# EAGLE board CryptoFlashRTC (EAGLE 7.7.0)
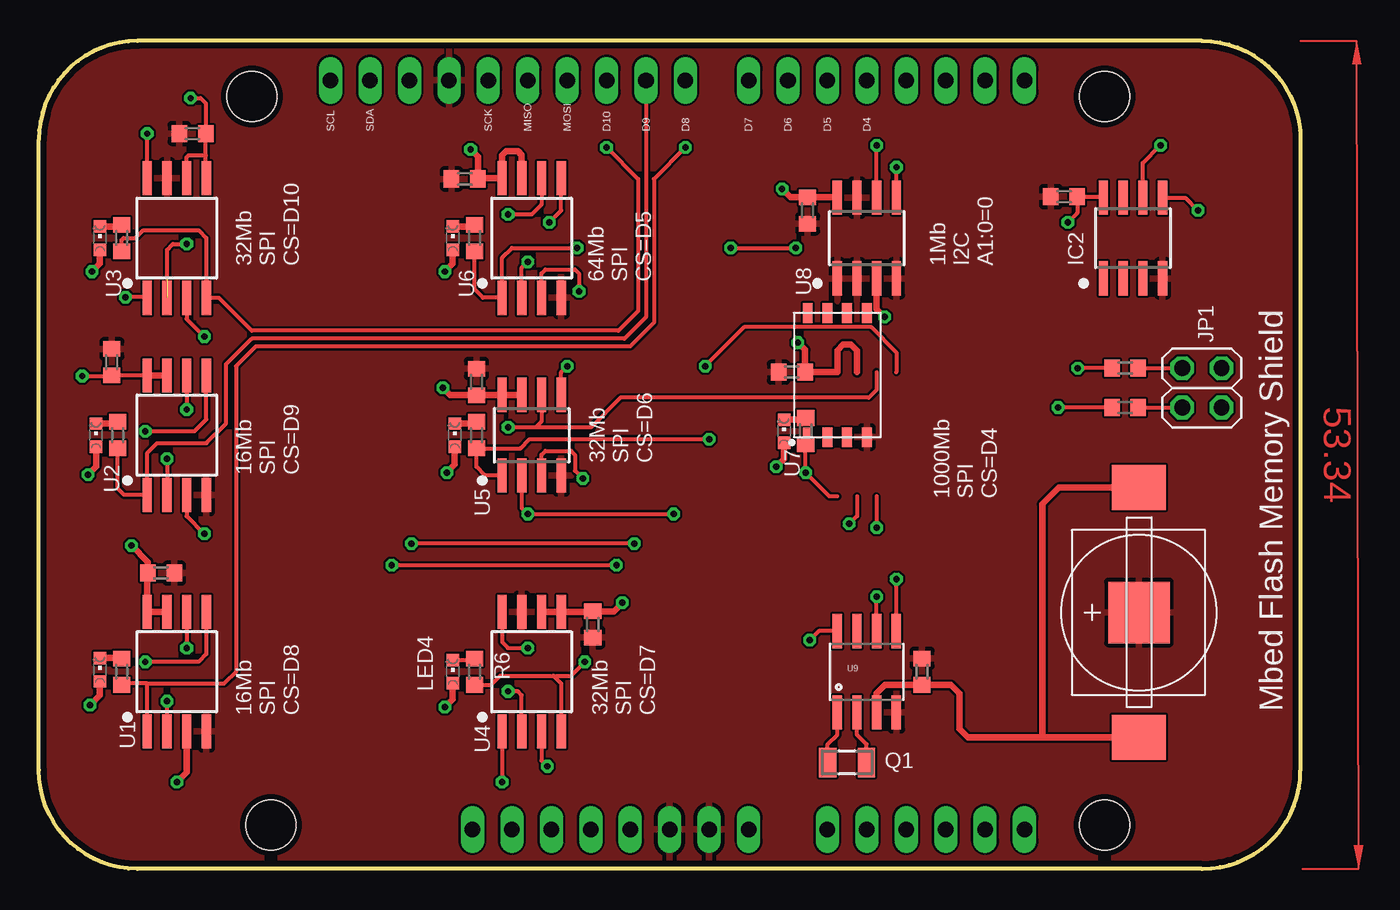
[diagram p0: board, top side]
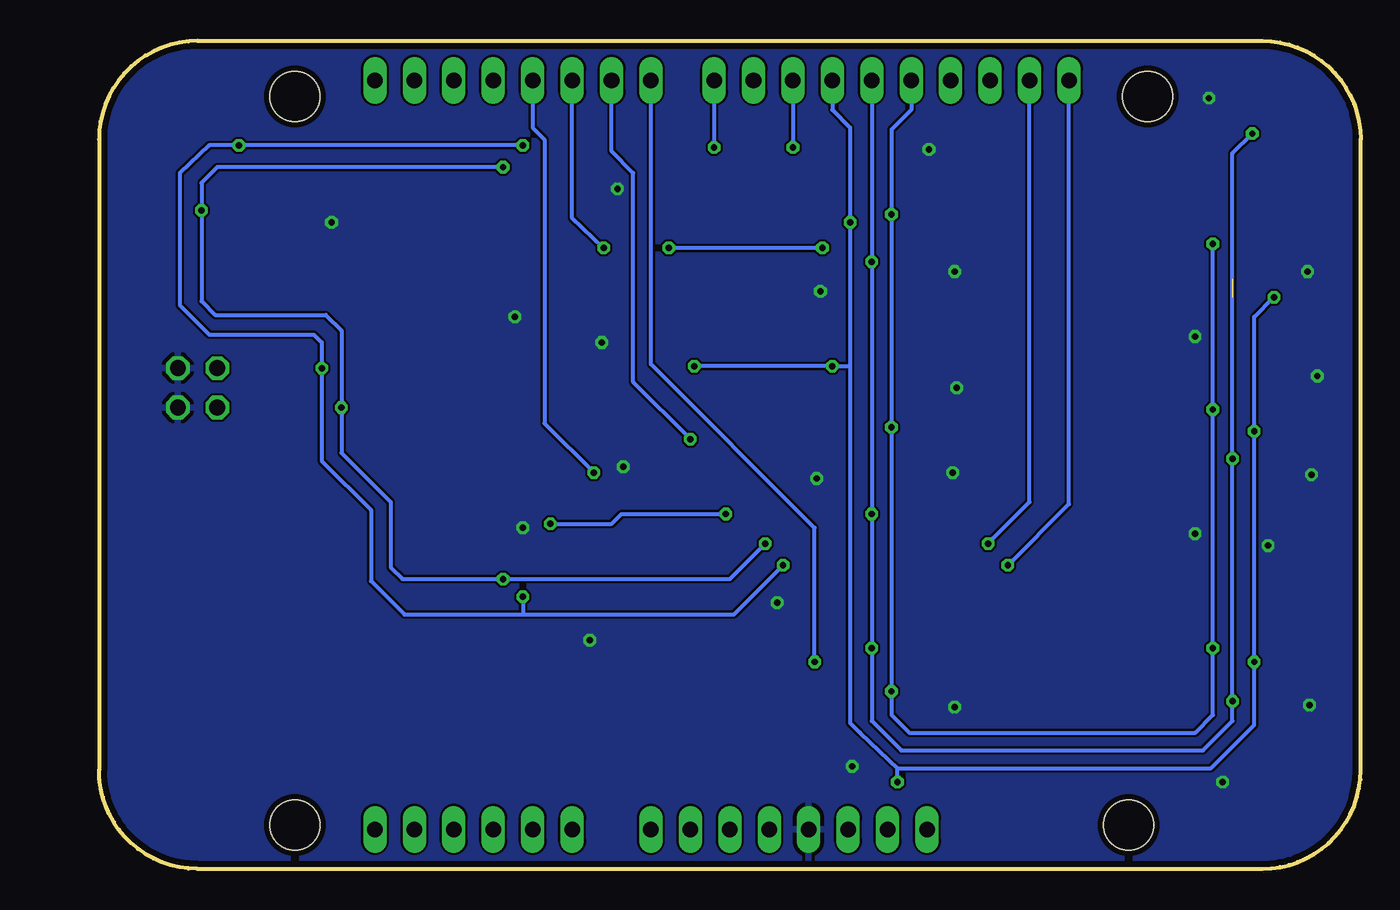
[diagram p1: board, bottom side, seen from below]

Size 81.28 x 53.34 mm. Coordinates in mm from the lower left corner, seen from the top.
Copper layers ((1*16)): Top 0.035mm / dielectric 0.8mm / Bottom 0.035mm
Design rules "mbed-HDK-6-6-2-layer": minimum track width 6mil, minimum drill 9mil, track to track 6mil, track to pad 6mil, pad to pad 6mil, via to via 6mil, smd to smd 6mil, copper to edge 15mil, drill to drill 8mil, minimum pad ring 10mil, minimum via ring 8mil, stop-mask expansion 4mil, vias tented up to drill 0mil, thermal gap 10mil

## Footprints (pad centres in the part's own frame; a part is rotated, then mirrored left to right if it is on the bottom)
K64F/K22F = drill 1 long: 1 27.94,2.54; 2 30.48,2.54; 3 33.02,2.54; 4 35.56,2.54; 5 38.1,2.54; 6 40.64,2.54; 7 43.18,2.54; 8 45.72,2.54; 9 50.8,2.54; 10 53.34,2.54; 11 55.88,2.54; 12 58.42,2.54; 13 60.96,2.54; 14 63.5,2.54; 15 63.5,50.8; 16 60.96,50.8; 17 58.42,50.8; 18 55.88,50.8; 19 53.34,50.8; 20 50.8,50.8; 21 48.26,50.8; 22 45.72,50.8; 23 41.656,50.8; 24 39.116,50.8; 25 36.576,50.8; 26 34.036,50.8; 27 31.496,50.8; 28 28.956,50.8; 29 26.416,50.8; 30 23.876,50.8; 31 21.336,50.8; 32 18.796,50.8 | hole 3.2: 13.729,49.759; 14.948,2.819; 68.656,2.819; 68.656,49.759
0603 = smd 1 x 1.1: 1 -0.85,0; 2 0.85,0
SO8 = smd 0.6 x 2.2: 1 -1.905,-2.6; 2 -0.635,-2.6; 3 0.635,-2.6; 4 1.905,-2.6; 5 1.905,2.6; 6 0.635,2.6; 7 -0.635,2.6; 8 -1.905,2.6
2X02 = drill 1.016 octagon: 1 -1.27,-1.27; 2 -1.27,1.27; 3 1.27,-1.27; 4 1.27,1.27
CHIPLED_0603 = smd 0.8 x 0.8: A 0,-0.75; C 0,0.75
FC135 = smd 1.1 x 1.9: X1 -1.25,0; X2 1.25,0
SO8-WIDE@1 = smd 0.6 x 2.2: 1 -1.905,-3.85; 2 -0.635,-3.85; 3 0.635,-3.85; 4 1.905,-3.85; 5 1.905,3.85; 6 0.635,3.85; 7 -0.635,3.85; 8 -1.905,3.85
SO8-WIDE = smd 0.6 x 2.2: 1 -1.905,-3.85; 2 -0.635,-3.85; 3 0.635,-3.85; 4 1.905,-3.85; 5 1.905,3.85; 6 0.635,3.85; 7 -0.635,3.85; 8 -1.905,3.85
8-U-PDFN = smd 1.27 x 0.635: 1 0,3.81; 2 0,2.54; 3 0,1.27; 4 0,0; 5 8,0; 6 8,1.27; 7 8,2.54; 8 8,3.81
SO08 = smd 0.61 x 2.21: 1 -1.905,-2.616; 2 -0.635,-2.616; 3 0.635,-2.616; 4 1.905,-2.616; 5 1.905,2.616; 6 0.635,2.616; 7 -0.635,2.616; 8 -1.905,2.616
3030 = smd 3.96 x 3.96: NEG 0,0 | smd 2.9 x 3.5: P$1 8.05,0; P$2 -8.05,0

## Placement (x,y rotation side)
BRD1  K64F/K22F-SHIELD  [K64F/K22F]  0,0 0 top
C1  100nF  [0603]  28.19,31.37 90 top
C2  100nF  [0603]  9.91,47.37 180 top
C3  100nF  [0603]  48.51,32 180 top
C4  100nF  [0603]  35.69,15.75 270 top
C5  100nF  [0603]  27.43,44.45 180 top
C6  100nF  [0603]  7.87,19.05 0 top
C7  100nF  [0603]  4.7,32.64 90 top
C8  100nF  [0603]  49.53,42.42 90 top
C9  100nF  [0603]  66.04,43.31 180 top
C10  100nF  [0603]  56.9,12.7 90 top
IC2  ATECC608A  [SO8]  70.48,40.64 0 top
JP1  [2X02]  74.93,30.99 270 top
LED1  RED  [CHIPLED_0603]  48.01,28.19 0 top
LED2  RED  [CHIPLED_0603]  26.67,40.64 0 top
LED3  RED  [CHIPLED_0603]  26.8,27.94 0 top
LED4  RED  [CHIPLED_0603]  26.67,12.7 0 top
LED5  RED  [CHIPLED_0603]  3.94,40.64 0 top
LED6  RED  [CHIPLED_0603]  3.68,27.94 0 top
LED7  RED  [CHIPLED_0603]  3.94,12.83 0 top
Q1  ABS07-32.768KHZ-T  [FC135]  52.07,6.86 0 top
R1  2k2  [0603]  69.98,32.26 180 top
R2  2k2  [0603]  69.98,29.72 180 top
R3  470R  [0603]  49.4,28.19 270 top
R4  470R  [0603]  28.07,40.64 270 top
R5  470R  [0603]  28.19,27.94 270 top
R6  470R  [0603]  28.07,12.7 270 top
R7  470R  [0603]  5.33,40.64 270 top
R8  470R  [0603]  5.08,27.94 270 top
R9  470R  [0603]  5.33,12.7 270 top
U1  S25FL116K0XNFA013  [SO8-WIDE@1]  8.89,12.7 0 top
U2  SST25VF016B-50-4C-S2AF-T  [SO8-WIDE]  8.89,27.94 0 top
U3  AT45DB321E-SHF-B  [SO8-WIDE]  8.89,40.64 0 top
U4  AT45DQ321-SHF-B  [SO8-WIDE]  31.75,12.7 0 top
U5  MX25R3235FM1IH0  [SO8]  31.75,27.94 0 top
U6  AT25DF641A-SH-B  [SO8-WIDE]  31.75,40.64 0 top
U7  MT29F1G01ABBFDWB-IT:FTR  [8-U-PDFN]  53.34,27.81 90 top
U8  24LC1025T-I/SN  [SO8]  53.34,40.64 0 top
U9  DS1307  [SO08]  53.34,12.7 0 top
U$1  3030  [3030]  70.87,16.51 90 top

## Library data of the parts
BRD1 = mbed-HDK-misc-Board
C1-C10 R1-R9 = mbed-HDK-RLC
IC2 = mbed-HDK-MF-ATMEL
JP1 = pinhead
LED1-LED7 = mbed-HDK-Optical; MF: Wurth Electronics Inc; MFN: 150060RS75000; OC-DIGIKEY: 732-4978-1-ND; OC-MOUSER: 710-150060RS75000; OC-NEWARK: 2322071
Q1 = mbed-HDK-Oscillator; MF: Abracon; MFN: ABS07-32.768KHZ-T; OC-DIGIKEY: 535-9542-1-ND; OC-MOUSER: 535-9542-1-ND; OC-NEWARK: 2101347
U1 = mbed-HDK-IC; MF: Cypress Semiconductor Corp; MFN: S25FL116K0XNFA013; OC-DIGIKEY: 428-4343-1-ND; OC-MOUSER: 727-25FL116K0XNFA013
U2 = mbed-HDK-IC; MF: Microchip; MFN: SST25VF016B-50-4C-S2AF-T; OC-DIGIKEY: SST25VF016B-50-4C-S2AF-TCT-ND; OC-MOUSER: 579-25VF016B5CS2AF-T
U3 = mbed-HDK-IC; MF: Adesto Technologies; MFN: AT45DB321E-SHF-B; OC-DIGIKEY: 1265-1072-5-ND; OC-MOUSER: 988-AT45DB321E-SHF-B; OC-NEWARK: 2414318
U4 = mbed-HDK-IC; MF: Adesto Technologies; MFN: AT45DQ321-SHF-B; OC-DIGIKEY: AT45DQ321-SHF-B-ND; OC-MOUSER: 988-AT45DQ321-SHF-B
U5 = mbed-HDK-IC; MF: Macronix; MFN: MX25R3235FM1IH0; OC-DIGIKEY: 1092-1175-ND
U6 = mbed-HDK-IC; MF: Adesto Technologies; MFN: AT25DF641A-SH-B; OC-DIGIKEY: 1265-1047-ND; OC-MOUSER: 988-AT25DF641A-SH-B
U7 = mbed-HDK-IC; MF: Micron Technology Inc.; MFN: MT29F1G01ABBFDWB-IT:F TR; OC-DIGIKEY: 557-1655-1-ND
U8 = mbed-HDK-IC; MF: Microchip Technology; MFN: 24LC1025T-I/SN; OC-DIGIKEY: 24LC1025T-I/SNCT-ND; OC-MOUSER: 579-24LC1025T-I/SN; OC-NEWARK: 86W6594
U9 = Seeed
U$1 = mbed-HDK-Connector; MF: Keystone; MFN: 3030; OC-DIGIKEY: 36-3030-ND; OC-MOUSER: 534-3030; OC-NEWARK: 39T8899

## Nets
+3.3V: BRD1.4 C1.1 C2.1 C3.1 C4.1 C5.1 C6.1 C7.1 C8.2 C9.1 IC2.8 JP1.2 JP1.4 LED1.A LED2.A LED3.A LED4.A LED5.A LED6.A LED7.A U1.3 U1.7 U1.8 U2.3 U2.7 U2.8 U3.3 U3.5 U3.6 U4.3 U4.5 U4.6 U5.3 U5.7 U5.8 U6.3 U6.7 U6.8 U7.3 U7.7 U7.8 U8.3 U8.8 U9.8
GND: BRD1.6 BRD1.7 BRD1.29 C1.2 C2.2 C3.2 C4.2 C5.2 C6.2 C7.2 C8.1 C9.2 C10.2 IC2.4 U1.4 U2.4 U3.7 U4.7 U5.4 U6.4 U7.4 U8.1 U8.2 U8.4 U8.7 U9.4 U$1.NEG
I2C_SCL: BRD1.32 IC2.6 R1.2 U8.6 U9.6
I2C_SDA: BRD1.31 IC2.5 R2.2 U8.5 U9.5
N$1: LED1.C R3.1
N$2: LED2.C R4.1
N$3: LED3.C R5.1
N$4: LED4.C R6.1
N$5: LED5.C R7.1
N$6: LED6.C R8.1
N$7: LED7.C R9.1
N$8: JP1.1 R1.1
N$9: JP1.3 R2.1
SPI_CS-1: BRD1.25 R7.2 U3.4
SPI_CS-2: BRD1.24 R8.2 U2.1
SPI_CS-3: BRD1.23 R9.2 U1.1
SPI_CS-4: BRD1.22 R6.2 U4.4
SPI_CS-5: BRD1.21 R5.2 U5.1
SPI_CS-6: BRD1.20 R4.2 U6.1
SPI_CS-7: BRD1.19 R3.2 U7.1
SPI_MISO: BRD1.27 U1.2 U2.2 U3.8 U4.8 U5.2 U6.2 U7.2
SPI_MOSI: BRD1.26 U1.5 U2.5 U3.1 U4.1 U5.5 U6.5 U7.5
SPI_SCK: BRD1.28 U1.6 U2.6 U3.2 U4.2 U5.6 U6.6 U7.6
VBAT: C10.1 U9.3 U$1.P$1 U$1.P$2
X1: Q1.X1 U9.1
X2: Q1.X2 U9.2

## Tracks (layer width: path | path; a pad name or v marks a point on that pad's centre or on a via)
+3.3V  (via drill 0.41)
  Top 0.254: U2.3 9.53,22.73 v10.67,21.59 | U4.3 32.38,6.99 v32.77,6.6 | U9.8 50.24,15.32 v49.66,14.73 | v66.29,41.66 66.89,42.25 C9.1 68.51,43.31 IC2.8 | 53.98,24 v53.98,21.97 | U5.3 32.38,26.67 32.64,26.92 34.29,26.92 34.54,26.67 34.54,25.65 v35.05,25.15 | U6.3 32.38,38.35 32.64,38.61 34.54,38.61 34.8,38.35 v34.8,37.21 | U2.8 C7.1 4.66,31.75 v2.79,31.75 | U3.3 9.53,35.43 v10.67,34.29 | v9.78,49.66 10.41,49.66 10.76,49.31 C2.1 10.76,45.97 | U3.5 10.76,44.53 10.76,45.97 | U3.6 9.53,45.85 9.65,45.97 10.76,45.97
  Top 0.406: v47.88,43.81 48.43,43.27 C8.2 51.41,43.27 U8.8 | v48.9,33.91 49.36,33.44 C3.1 51.43,32 51.44,32 51.44,33.4 51.82,33.78 52.32,33.78 52.7,33.4 52.7,32 | U8.3 53.98,36.07 v54.48,35.56 | LED4.A 26.67,10.92 v26.16,10.41 | LED7.A 3.94,11.18 v3.3,10.54 | U1.3 9.53,6.22 v8.89,5.59 | v5.97,20.83 7.02,19.77 C6.1 6.98,19.01 U1.8 U1.7 | U2.7 U2.8 | LED6.A 3.68,25.91 v3.17,25.4 | LED5.A 3.94,38.99 v3.43,38.48 | U6.7 31.11,45.97 30.86,46.23 30.1,46.23 29.84,45.97 U6.8 28.32,44.49 C5.1 28.28,45.89 v27.81,46.35 | LED2.A 26.67,38.99 v26.16,38.48 | LED3.A 26.8,26.04 v26.29,25.53 | U5.7 U5.8 28.22,30.54 C1.1 26.5,30.52 v26.03,30.99 | U4.6 U4.5 35.64,16.55 C4.1 37.05,16.6 v37.59,17.14 | LED1.A 48.01,26.42 v47.5,25.91
  pour Bottom: 0,53.21 0,-0.13 81.41,0 81.28,53.34
GND
  pour Top: 0,53.21 0,-0.13 81.41,0 81.28,53.34
I2C_SCL  (via drill 0.41)
  Top 0.254: U8.6 v53.98,46.61 | v37.21,19.56 v22.73,19.56 | IC2.6 71.12,45.47 v72.26,46.61 | R1.2 v66.93,32.26 | U9.6 v53.98,17.53
  Bottom 0.254: v53.98,46.61 v72.26,46.61 74.17,46.61 76.07,44.83 76.07,36.32 74.17,34.42 67.44,34.42 66.93,33.91 v66.93,32.26 66.93,26.29 63.75,23.11 63.75,18.54 61.59,16.38 53.98,16.38 | 53.98,16.38 40.39,16.38 v37.21,19.56 | v22.73,19.56 18.8,23.5 BRD1.32 | v53.98,17.53 53.98,16.38
I2C_SDA  (via drill 0.41)
  Top 0.254: U8.5 v55.24,45.21 | v38.35,20.96 v24,20.96 | IC2.5 73.85,43.24 v74.68,42.42 | R2.2 v65.66,29.72 | U9.5 v55.24,18.67
  Bottom 0.254: v55.24,45.21 73.66,45.21 74.68,44.2 v74.68,42.42 74.68,36.58 73.79,35.69 66.67,35.69 65.66,34.67 v65.66,29.72 65.66,26.8 62.48,23.62 62.48,19.43 61.72,18.67 v55.24,18.67 40.64,18.67 v38.35,20.96 | v24,20.96 21.34,23.62 BRD1.31
N$1
  Top 0.406: LED1.C 49.3,28.94 R3.1
N$2
  Top 0.406: LED2.C 27.97,41.39 R4.1
N$3
  Top 0.406: LED3.C 28.09,28.69 R5.1
N$4
  Top 0.254: LED4.C 27.97,13.45 R6.1
N$5
  Top 0.406: LED5.C 5.23,41.39 R7.1
N$6
  Top 0.406: LED6.C 4.98,28.69 R8.1
N$7
  Top 0.406: LED7.C 5.31,13.58 R9.1
N$8
  Top 0.254: R1.1 JP1.1
N$9
  Top 0.254: R2.1 JP1.3
SPI_CS-1  (via drill 0.41)
  Top 0.254: v36.58,46.48 38.61,44.45 38.61,35.94 37.34,34.67 13.72,34.67 11.6,36.79 U3.4 10.8,40.64 10.29,41.15 6.73,41.15 6.22,40.64 5.46,40.64 5.33,40.51 R7.2
  Bottom 0.254: BRD1.25 v36.58,46.48
SPI_CS-2
  Top 0.254: R8.2 5.08,24.51 5.5,24.09 U2.1 6.98,26.8 7.62,27.43 10.8,27.43 12.06,28.7 12.06,32.51 13.72,34.16 37.72,34.16 39.12,35.56 BRD1.24
SPI_CS-3  (via drill 0.41)
  Top 0.254: v41.66,46.48 39.62,44.45 39.62,35.18 38.1,33.65 13.97,33.65 12.7,32.38 12.7,12.7 11.94,11.94 6.98,11.94 | U1.1 6.98,11.94 | 6.98,11.94 5.42,11.94 R9.2
  Bottom 0.254: BRD1.23 v41.66,46.48
SPI_CS-4  (via drill 0.41)
  Top 0.254: R6.2 29.12,11.85 29.72,12.45 33.15,12.45 | 33.15,12.45 33.66,11.94 U4.4 | 33.15,12.45 34.29,12.45 v35.18,13.34
  Bottom 0.254: v35.18,13.34 35.18,21.97 45.72,32.51 BRD1.22
SPI_CS-5  (via drill 0.41)
  Top 0.254: U5.1 28.76,25.34 28.19,25.91 R5.2 31.03,27.09 31.62,27.69 v43.18,27.69
  Bottom 0.254: v43.18,27.69 46.86,31.37 46.86,44.83 48.26,46.23 BRD1.21
SPI_CS-6  (via drill 0.41)
  Top 0.254: R4.2 28.07,37.34 28.61,36.79 U6.1 29.84,39.37 30.48,40 v34.67,40 | v44.58,40 v48.77,40
  Bottom 0.254: v48.77,40 50.8,41.91 BRD1.20 | v34.67,40 v44.58,40
SPI_CS-7  (via drill 0.41)
  Top 0.254: 51.44,24 50.93,24 v49.4,25.53 R3.2
  Bottom 0.254: BRD1.19 53.34,47.75 52.58,46.99 52.58,28.7 v49.4,25.53
SPI_MISO  (via drill 0.41)
  Top 0.254: v8.25,26.42 U2.2 | U1.2 v8.25,10.79 | U4.8 29.84,14.61 30.23,14.22 v31.5,14.22 | U6.2 31.11,38.73 v31.5,39.12 | U5.2 31.11,23.24 v31.5,22.86 v40.89,22.86 | 52.7,24 52.7,22.73 v52.2,22.23 | U3.8 v6.98,47.37
  Bottom 0.254: BRD1.27 v31.5,39.12 v31.5,22.86 v31.5,14.22 31.5,9.53 29.59,7.62 10.16,7.62 8.25,9.53 v8.25,10.79 v8.25,26.42 8.25,46.1 v6.98,47.37 | v52.2,22.23 48.26,22.23 47.62,22.86 v40.89,22.86
SPI_MOSI  (via drill 0.41)
  Top 0.254: v6.86,28.19 10.03,28.19 10.8,28.96 U2.5 | U1.5 10.8,13.84 10.29,13.34 v6.86,13.34 | U4.1 v29.84,5.59 | v32.89,41.66 33.66,42.42 U6.5 | U5.5 33.66,32 v34.04,32.38 | v42.93,32.38 45.47,34.92 53.59,34.92 55.24,33.27 55.24,32 | U3.1 6.94,36.83 v5.59,36.83
  Bottom 0.254: BRD1.26 34.04,48.89 32.89,47.75 v32.89,41.66 32.89,32.38 | 32.89,32.38 32.89,9.4 32.26,8.76 29.84,6.48 | 29.84,6.48 9.65,6.48 6.86,9.27 v6.86,13.34 v6.86,28.19 6.86,35.56 v5.59,36.83 | v29.84,5.59 29.84,6.48 | 32.89,32.38 v34.04,32.38 v42.93,32.38
SPI_SCK  (via drill 0.41)  (1 unrouted)
  Top 0.254: 8.25,38.04 8.25,39.88 8.64,40.26 v9.53,40.26 | U2.6 v9.53,29.59 | U1.6 v9.53,14.22 | U4.2 31.11,11.18 30.86,11.43 v30.23,11.43 | U6.6 32.38,42.8 31.75,42.16 v30.23,42.16 | U5.6 32.38,28.83 32.07,28.51 | 32.07,28.51 32,28.45 v30.23,28.45 | 53.98,32 53.98,30.86 53.47,30.35 37.47,30.35 35.56,28.45 32.13,28.45 32.07,28.51
  Bottom 0.254: BRD1.28 28.96,48.89 30.23,47.62 v30.23,42.16 v30.23,28.45 v30.23,11.43 30.23,9.91 29.08,8.76 10.67,8.76 9.53,9.91 v9.53,14.22 v9.53,29.59 v9.53,40.26
VBAT
  Top 0.406: 64.64,8.46 U$1.P$2 | U$1.P$1 65.71,24.56 64.64,23.5 64.64,8.46 | 64.64,8.46 59.87,8.46 59.31,9.02 59.31,11.3 58.76,11.85 C10.1 54.52,11.85 53.98,11.3 U9.3
X1
  Top 0.254: Q1.X1 50.82,8.02 51.44,8.64 U9.1
X2
  Top 0.254: Q1.X2 53.32,8.02 52.7,8.64 U9.2
(copper drawn outside any net)
  shapes: Top area x1

## Text on the board
tPlace: SCL / / SDA | SCK / / MISO / / MOSI / / D10 / / D9 / / D8 | D7 / / D6 / / D5 / / D4 | 32Mb / SPI / CS=D10 | 1Mb / I2C / A1:0=0 | 64Mb / SPI / CS=D5 | 16Mb / SPI / CS=D9 | 32Mb / SPI / CS=D6 | 1000Mb / SPI / CS=D4 | 16Mb / SPI / CS=D8 | 32Mb / SPI / CS=D7 | Mbed Flash Memory Shield